# Altium PCB Tray2.PcbDoc (part 2 of 6)
Units mil, origin at the board's own origin, x right, y up, seen from the top; angles counter-clockwise.
Board outline 6000 x 4000 mil, 2 copper layers (Top Layer, Bottom Layer); 418 components, 415 nets, 1799 pads, 870 vias.
Unrouted connection lines stored in the file: 363.
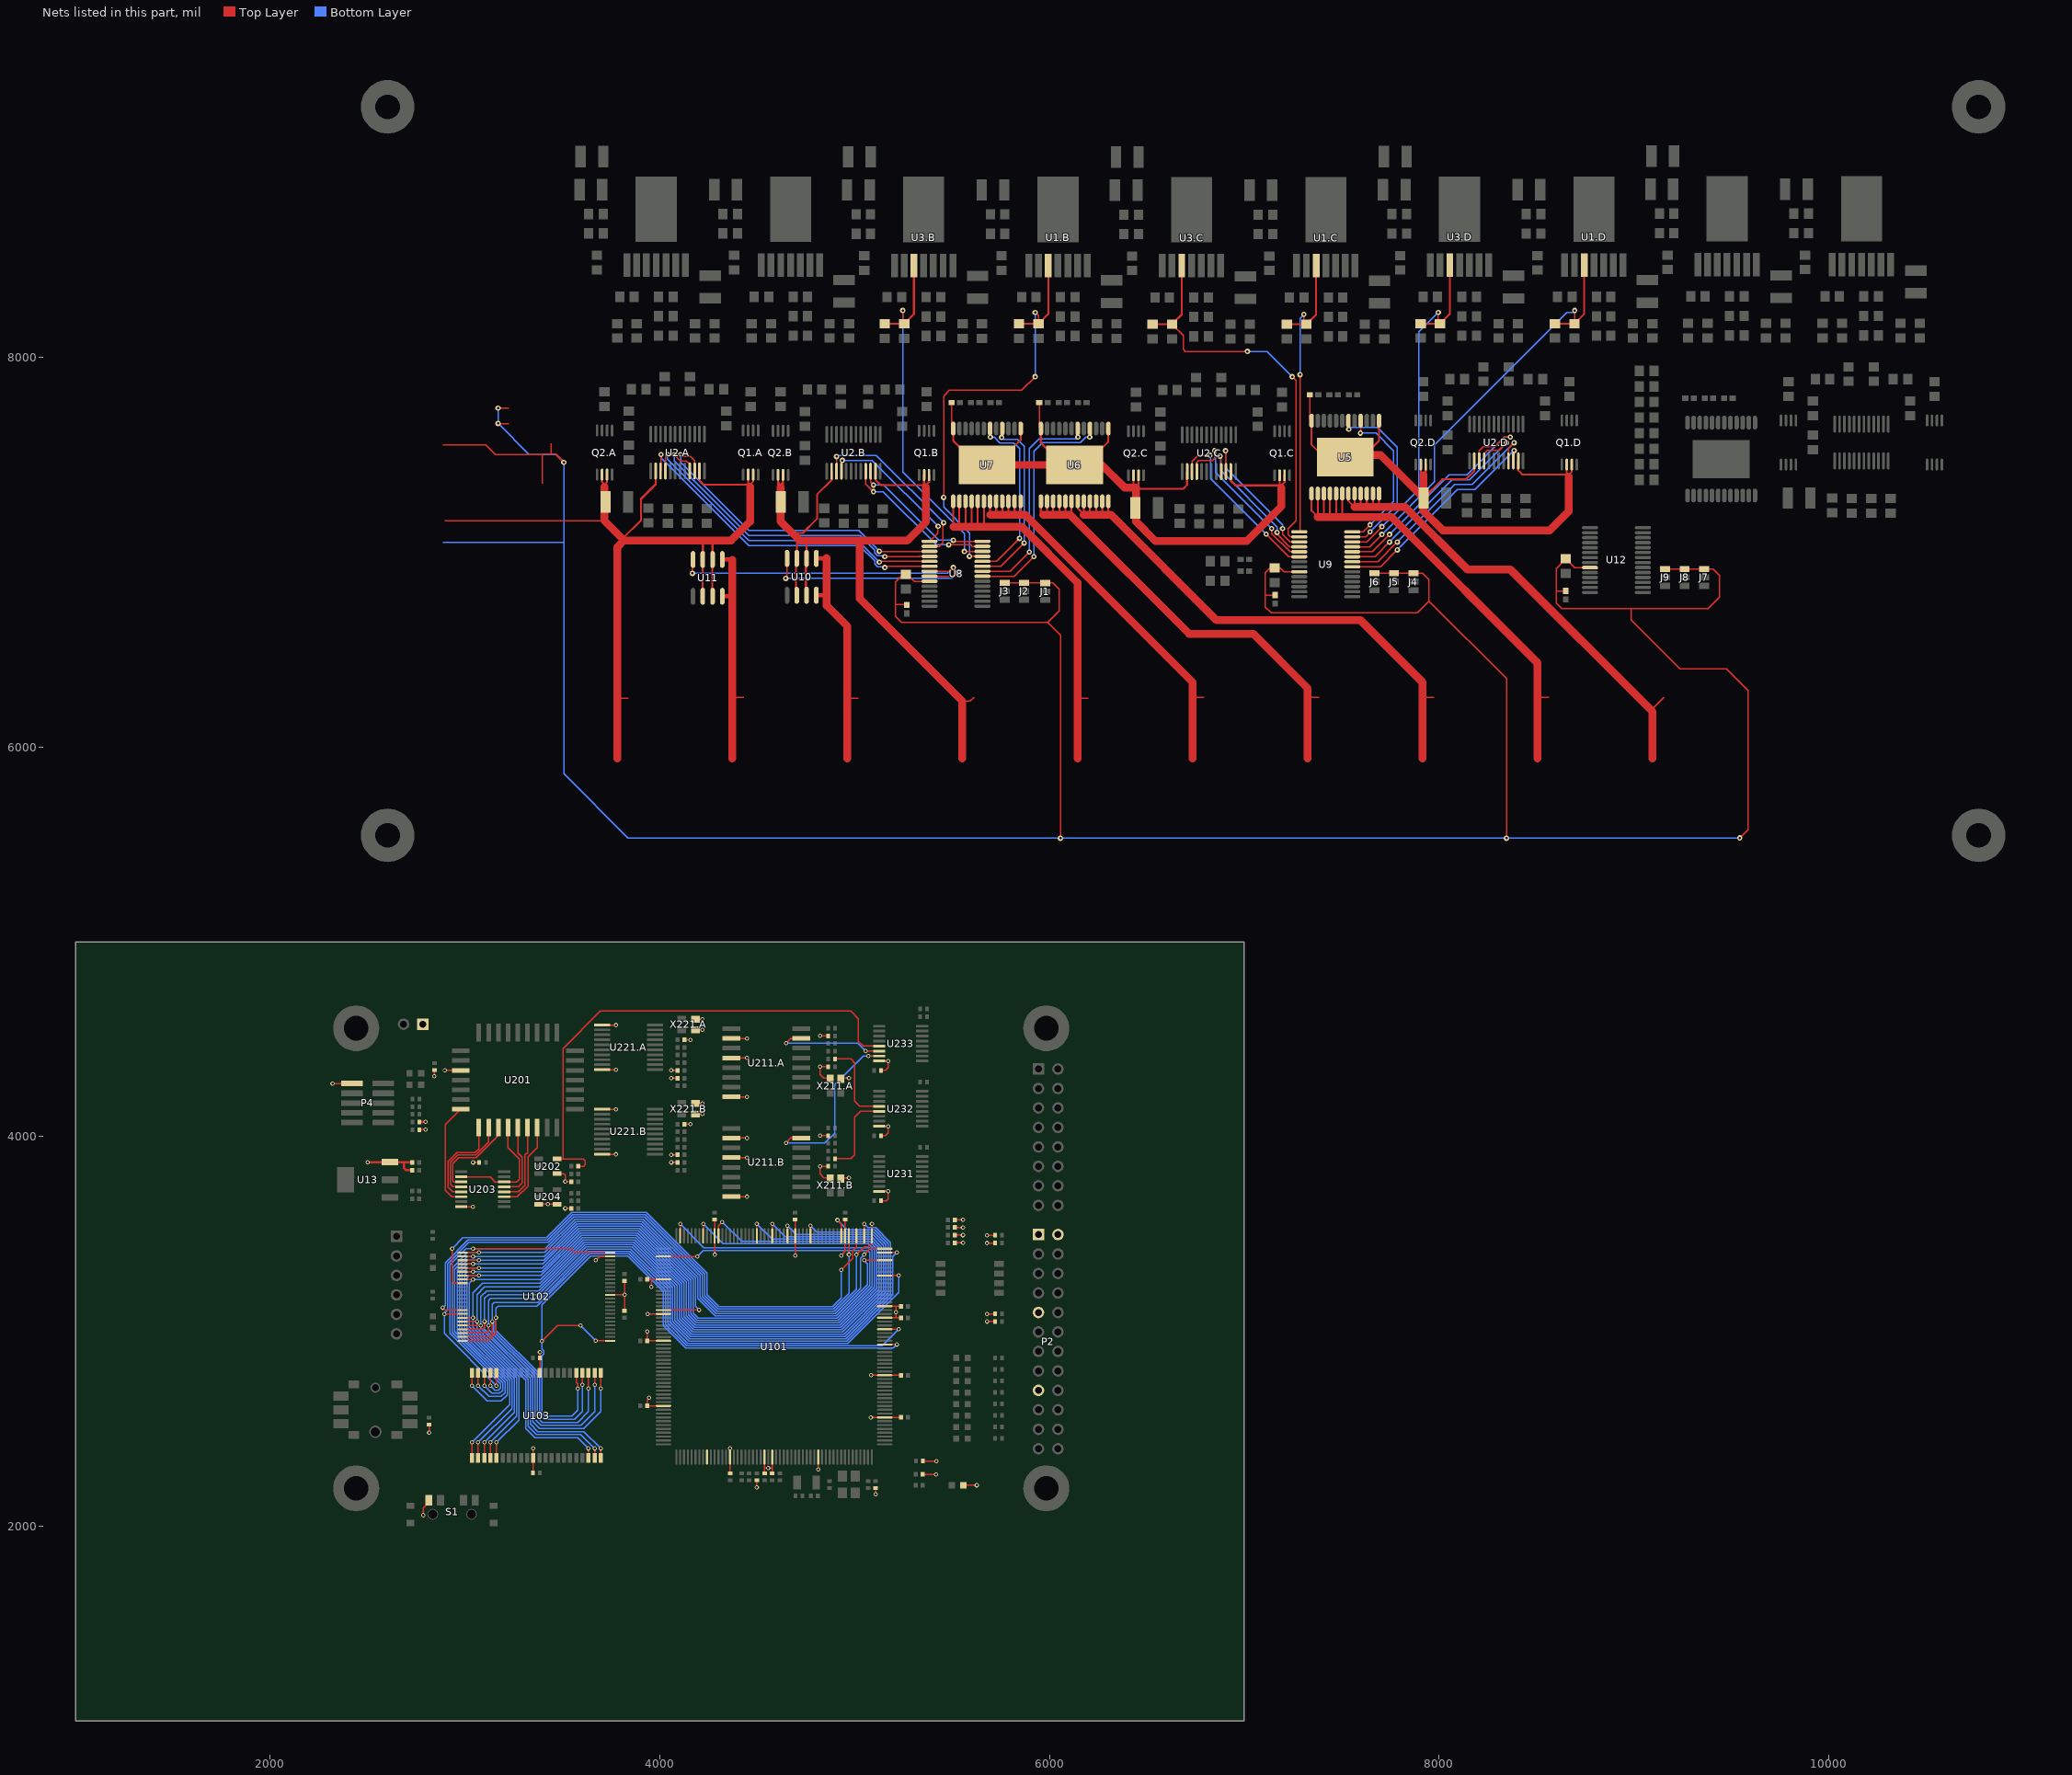
[diagram p2: the nets of this part, all layers, seen from the top]

## Part data
C1.A C1.B C1.C C1.D C1.E C2.A C2.B C2.C C2.D C2.E C3.A C3.B C3.C C3.D C3.E C4.A C4.B C4.C C4.D C4.E C5.A C5.B C5.C C5.D C5.E C6.A C6.B C6.C C6.D C6.E C7.A C7.B C7.C C7.D C7.E C8.A C8.B C8.C C8.D C8.E C9.A C9.B C9.C C9.D C9.E C10.A C10.B C10.C C10.D C10.E C11.A C11.B C11.C C11.D C11.E C12.A C12.B C12.C C12.D C12.E C13.A C13.B C13.C C13.D C13.E C14.A C14.B C14.C C14.D C14.E C15.A C15.B C15.C C15.D C15.E C16.A C16.B C16.C C16.D C16.E C17.A C17.B C17.C C17.D C17.E C18.A C18.B C18.C C18.D C18.E C19.A C19.B C19.C C19.D C19.E C20 C21 C22: library part Cap, "Capacitor"
C23 C24 C25 C26 C101 C102 C103 C104 C105 C106 C107 C108 C109 C110 C111 C112 C113 C114 C115 C116 C117 C118 C119 C120 C121 C122 C123 C201 C202 C203 C204 C205 C206 C211.A C211.B C212.A C212.B C213.A C213.B C214.A C214.B C221.A C221.B C222.A C222.B C223.A C223.B C224.A C224.B C231 C232 C233: "Capacitor"
D1 D2 D3 D4 D5 D6 D7 D8 D9 D10 D11 D12 D13: library part LED, "Typical INFRARED GaAs LED 0603"
D100 D101: "Typical INFRARED GaAs LED"
FB1.A FB1.B FB1.C FB1.D FB1.E FB2.A FB2.B FB2.C FB2.D FB2.E: library part Inductor, "Inductor"
FB101: library part FB_0402, "Ferite Bead : 0402"
P1: "Header, 8-Pin, Dual row"
P2: "Header, 12-Pin, Dual row"
P4: "Mates with FFSD-05-D-12.00-01-N"
P5: "Header, 2-Pin"
Q1.A Q1.B Q1.C Q1.D Q1.E Q2.A Q2.B Q2.C Q2.D Q2.E: "N-Channel MOSFET"
R1 R2 R3 R4 R5 R6 R7 R8 R9 R10 R46 R47 R48 R49 R50 R51 R52 R53 R54 R55 R56 R57 R58 R59 R60 R101 R102 R103 R104 R201 R202 R211.A R211.B R212.A R212.B R221.A R221.B R222.A R222.B R223.A R223.B R231 R232 R233 R234: "Resistor"
R1.A R1.B R1.C R1.D R1.E R2.A R2.B R2.C R2.D R2.E R3.A R3.B R3.C R3.D R3.E R4.A R4.B R4.C R4.D R4.E R5.A R5.B R5.C R5.D R5.E R6.A R6.B R6.C R6.D R6.E R7.A R7.B R7.C R7.D R7.E R8.A R8.B R8.C R8.D R8.E R9.A R9.B R9.C R9.D R9.E R10.A R10.B R10.C R10.D R10.E R11.A R11.B R11.C R11.D R11.E R12.A R12.B R12.C R12.D R12.E R13.A R13.B R13.C R13.D R13.E R14.A R14.B R14.C R14.D R14.E R15.A R15.B R15.C R15.D R15.E R16.A R16.B R16.C R16.D R16.E R17.A R17.B R17.C R17.D R17.E R18.A R18.B R18.C R18.D R18.E R19 R20 R21 R22 R23 R24 R25 R26 R27 R28 R29 R30 R31 R32 R33 R34 R35 R36 R37 R38 R39 R40 R41 R42 R43 R44.A R44.B R44.C R44.D R44.E R45.A R45.B R45.C R45.D R45.E: library part Res3, "Resistor"
S1: "Slide switch SP3T switch"
S2: "DIP Switch - 1571983-5"
S3: "Tact Switch"
U1.A U1.B U1.C U1.D U1.E U3.A U3.B U3.C U3.D U3.E: "1A SIMPLE SWITCHER® Power Module for High Output  Voltage"
U2.A U2.B U2.C U2.D U2.E: "Dual Ideal Diode and  Hot Swap Controller"
U4 U5 U6 U7: "Double channel high-side driver with analog current sense"
U8 U9 U12: "16-Bit I/O Expander with Serial Interface"
U10 U11: "Single Protected High Side Switches"
U101: "ARM7 16/32-Bit Microcontroller, 512KB Flash, 98KB RAM, 208-Lead LQFP"
U102: "16-Mbit (1M x 16) Static RAM"
U103: "FRAM, 2MB, 3V, 60NS, 44TSOP2"
U201: "512 Kbit (32Kb X 8) UV EPROM and OTP EPROM"
U202 U204: library part MIC1557, "Miniature Astable Timer Chip"
U203: "Dual Binary Up-Counter"
U211.A U211.B: "Bell 202 Compatible Modem"
U221.A U221.B: "3 Volt Integrated DTMF Receiver"
U231 U232: "Triple 2-Channnel Analog Multiplexer/Demutiplexer"
U233: "8-Channel Analog Multiplexer/Demultiplexer"
X101: library part "C.O. 4pins", "Crystal Oscillator"
X102: library part "C.O. 2pins", "Crystal Oscillator"
X211.A X211.B X221.A X221.B: "SMD Clock Oscillator, 3.579545MHz"

## Free pads (board coordinates)
  round 236.22 hole 125.98: 0(2441.02,4556.22) 1(5984.33,4556.22) 2(5984.33,2194.02) 3(2441.02,2194.02)
  round 275.59 hole 125.98: 0(2602.28,5546.97) 1(2602.28,9287.13) 2(10771.57,9287.13) 3(10771.57,5546.97)

## Via types
v1: diameter 21.65, hole 11.81, Top Layer to Bottom Layer, tented both sides, 370 vias
v2: diameter 27.56, hole 11.81, Top Layer to Bottom Layer, tented both sides, 231 vias
v3: diameter 27.56, hole 11.81, Top Layer to Bottom Layer, tented bottom, 120 vias
v4: diameter 25.98, hole 12.99, Top Layer to Bottom Layer, tented both sides, 96 vias
v5: diameter 50, hole 28, Top Layer to Bottom Layer, tented both sides, 40 vias
v6: diameter 21.65, hole 13.78, Top Layer to Bottom Layer, 13 vias

## Nets (pads, with @x,y where several pads share a name; then routed paths per layer and width w, separated by ;. In a path a pad name is that pad's centre, name@x,y a point inside that pad or via, vN(x,y) a via of type N, cw(c..) or ccw(c..) an arc to the next point about the centre after c; other vN are vias at no path point)
3V0_PAYLOAD_EN: U8.7 U11.4 | length 1550.4
  Top Layer w6: v2(4167.01,6891.69) U11.4@4167.01,6959.49 ; U8.7@5384.8,6902.44 5487.76,6902.44 v2(5507.01,6921.69)
  Bottom Layer w6: v2(4167.01,6891.69) 5477.01,6891.69 v2(5507.01,6921.69)
3V3: C1.A.2 C23.2 C24.2 C101.2 C102.2 C103.2 C104.2 C105.2 C106.2 C107.2 C108.2 C109.2 C110.2 C111.2 C112.2 C113.2 C116.2 C117.2 C118.2 C119.2 C201.1 C202.1 C203.1 C204.2 C211.A.2 C211.B.2 C212.A.2 C212.B.2 C222.A.2 C222.B.2 C223.A.1 C223.B.1 C224.A.1 C224.B.1 C231.2 C232.2 C233.2 D9.1 FB101.1 P2.1 P2.2 P2.9 P2.17 P4.1 P5.1 Q1.A.S2 Q2.A.S1 R1.2 R2.2 R3.2 R4.2 R5.2 R6.2 R46.1 R47.1 R48.1 R49.1 R50.1 R51.2 R102.2 R103.2 S1.1 U2.A.14 U2.A.23 U11.2 U11.3 U11.6 U11.7 U13.3 U101.9 U101.15 U101.24 U101.26 U101.38 U101.60 U101.71 U101.86 U101.89 U101.112 U101.125 U101.146 U101.165 U101.174 U101.181 U101.198 U102.37 U102.47 U103.11 U103.33 U201.32 U202.4 U203.16 U204.3 U204.4 U211.A.10 U211.A.12 U211.A.16 U211.B.10 U211.B.12 U211.B.16 U221.A.11 U221.A.20 U221.B.11 U221.B.20 U231.16 U232.16 U233.16 X211.A.1 X211.A.4 X211.B.1 X211.B.4 X221.A.1 X221.A.4 X221.B.1 X221.B.4 | length 10687
  Top Layer w5.91: v1(2319.17,4272.17) 2319.37,4272.36 P4.1@2420.08,4272.36 ; R51.2@2765.83,4035.55 v1(2797.32,4035.55) ; v1(2785.51,2056.22) 2785.51,2092.53 S1.1@2814.15,2121.17 ; v1(2815.04,2479.45) R50.1@2815.04,2520.79 ; v1(2842.6,4310.16) C201.1@2842.6,4339.69 ; v6(2895.55,4340.47) U201.32@2977.05,4340.47 ; U203.16@2980.39,3639.88 v1(3039.45,3639.88) ; v1(3041.42,3867.24) C203.1@3072.91,3867.24 ; C117.2@3348.5,2272.76 U103.33@3348.5,2347.56 ; U103.33@3350.47,2349.53 v1(3350.47,2400.71) ; U204.3@3378.03,3652.68 v1(3425.28,3652.68) U204.4@3472.52,3652.68 ; U103.11@3383.94,2788.5 C116.2@3383.94,2863.31 v1(3383.94,2892.83) ; U202.4@3472.52,3810.16 3505.98,3810.16 3513.86,3802.28 v1(3513.86,3768.82) C202.1@3545.35,3768.82 ; v1(3513.86,3631.02) C204.2@3545.35,3631.02 ; v1(3671.34,3365.28) 3691.02,3384.96 U102.47@3745.16,3384.96 ; U221.B.20@3728.43,3909.57 v1(3774.68,3909.57) ; U221.B.11@3728.43,4139.88 v1(3774.68,4139.88) ; U221.A.20@3728.43,4342.64 v1(3774.68,4342.64) ; U221.A.11@3728.43,4572.95 v1(3774.68,4572.95) ; U102.37@3745.16,3188.11 v1(3818.98,3188.11) ; C119.2@3818.98,3105.43 v1(3818.98,3188.11) ; C118.2@3818.98,3258.98 v1(3818.98,3188.11) ; C111.2@3935.12,3266.85 3956.77,3266.85 ; v1@3937.09,3001.1 v1(3935.12,2999.13) C112.2@3935.12,2951.89 U101.181@4018.78,2951.89 ; v1(3937.09,3089.69) U101.174@4018.78,3089.69 ; v1(3944.96,2658.58) 3935.12,2648.74 C113.2@3935.12,2617.24 U101.198@4018.78,2617.24 ; v1(3956.77,3227.48) 3956.77,3266.85 ; U101.165@4018.78,3266.85 3956.77,3266.85 ; v1(4059.13,3867.24) C222.B.2@4090.63,3867.24 ; v1(4059.13,3906.61) C223.B.1@4090.63,3906.61 ; v1(4059.13,4300.32) C222.A.2@4090.63,4300.32 ; v1(4059.13,4339.69) C223.A.1@4090.63,4339.69 ; C224.B.1@4126.06,4064.09 v1(4157.56,4064.09) ; C224.A.1@4126.06,4497.17 v1(4157.56,4497.17) ; X221.B.4@4183.15,4115.28 v1@4216.61,4115.28 ; X221.A.4@4183.15,4548.35 v1(4218.58,4548.35) ; X221.A.1@4183.15,4603.46 v1(4218.58,4603.46) ; X221.B.1@4185.12,4170.39 v1(4218.58,4170.39) ; v1@4281.57,3404.65 U101.146@4281.57,3490.28 C110.2@4281.57,3573.94 ; C101.2@4360.31,2272.76 U101.15@4360.31,2354.45 v1(4360.31,2399.72) v1@4360.31,2404.65 ; U211.B.16@4368.19,3692.24 v1(4447.32,3692.24) ; U211.B.12@4368.19,3892.24 v1(4447.32,3892.24) ; U211.B.10@4368.19,3992.24 v1(4447.32,3992.24) ; U211.A.16@4368.19,4204.06 v1(4447.32,4204.06) ; U211.A.12@4368.19,4404.06 v1(4447.32,4404.06) ; U211.A.10@4368.19,4504.06 v1(4447.32,4504.06) ; v1(4498.11,2198.94) FB101.1@4498.11,2235.35 ; C102.2@4535.51,2272.76 4537.48,2274.72 U101.24@4537.48,2354.45 ; 4537.48,2297.36 v1(4557.17,2297.36) 4576.85,2297.36 ; U101.26@4576.85,2354.45 4576.85,2297.36 ; C103.2@4578.82,2272.76 4576.85,2274.72 4576.85,2297.36 ; v1(4694.96,3389.88) U101.125@4694.96,3490.28 C109.2@4694.96,3573.94 ; v1(4813.07,2291.46) U101.38@4813.07,2362.32 ; v1(4822.91,4005.04) C211.B.2@4864.25,4005.04 ; v1(4822.91,4516.85) C211.A.2@4864.25,4516.85 ; C212.B.2@4864.25,3847.56 v1(4822.91,3847.56) 4822.91,3808.19 4842.6,3788.5 4870.16,3788.5 X211.B.1@4874.09,3784.57 ; C212.A.2@4864.25,4359.37 v1(4822.91,4359.37) 4822.91,4320 4842.6,4300.31 4870.16,4300.31 X211.A.1@4874.09,4296.38 ; X211.B.4@4929.21,3784.57 4933.15,3788.5 v1(4970.55,3788.5) ; X211.A.4@4929.21,4296.38 4933.15,4300.31 v1(4970.55,4300.31) ; v1(4931.18,3389.88) 4950.87,3409.57 U101.112@4950.87,3490.28 C108.2@4950.87,3573.94 ; v1(5083.74,2558.19) U101.60@5154.61,2558.19 C104.2@5238.27,2558.19 ; v1(5084.72,2774.72) U101.71@5154.61,2774.72 C105.2@5238.27,2774.72 ; v1(5108.35,2164.49) R102.2@5108.35,2195.98 ; U231.16@5126.06,3718.62 v1(5172.32,3718.62) 5172.32,3680.24 5162.48,3670.39 C231.2@5135.91,3670.39 ; U232.16@5126.06,4053.27 v1(5172.32,4053.27) 5172.32,4019.8 5157.56,4005.04 C232.2@5135.91,4005.04 ; U233.16@5126.06,4387.91 v1(5172.32,4387.91) 5172.32,4354.45 5157.56,4339.69 C233.2@5135.91,4339.69 ; U101.86@5154.61,3070 5211.69,3070 ; U101.89@5154.61,3129.06 5211.69,3129.06 ; C106.2@5238.27,3070 5211.69,3070 ; C107.2@5238.27,3129.06 5211.69,3129.06 ; R5.2@5349.49,2265.87 v1(5418.39,2265.87) ; R6.2@5350.47,2333.78 v1(5419.37,2333.78) ; R4.2@5514.84,3454.84 v1(5556.18,3454.84) ; R3.2@5514.84,3494.21 v1(5556.18,3494.21) ; R2.2@5514.84,3533.58 v1(5556.18,3533.58) ; R1.2@5514.84,3572.95 v1(5556.18,3572.95) ; D9.1@5558.15,2209.76 v1(5627.05,2209.76) ; v1(5679.21,3050.32) R48.1@5720.55,3050.32 ; v1(5679.21,3089.69) R49.1@5720.55,3089.69 ; v1(5679.21,3453.86) R46.1@5720.55,3453.86 ; v1(5679.21,3493.23) R47.1@5720.55,3493.23 ; 5211.69,3070 v1(5211.69,3099.53) 5211.69,3129.06
  Top Layer w6: 2896.42,7161.1 3716.18,7161.1 ; 3781.81,6251.69 3837.48,6251.69
  Top Layer w10: Q2.A.S1@3703.39,7398.94 3703.39,7361.14 3716.18,7348.35 ; 3716.18,7329.06 3716.18,7348.35 ; Q2.A.S1@3728.98,7398.94 3728.98,7361.14 3716.18,7348.35 ; 3808.3,7068.98 3903.01,7163.69 3903.01,7273.95 3978.68,7349.63 U2.A.14@3978.68,7417.64 ; U2.A.23@4203.68,7417.64 4203.68,7369.63 4226.18,7347.13 4456.18,7347.13 ; U11.6@4219.69,6745.71 U11.3@4219.69,6934.69 ; U11.3@4220.71,6963.19 4220.71,7060.08 ; U11.7@4269.69,6745.71 U11.2@4269.69,6934.69 ; U11.2@4270.71,6963.19 4270.71,7060.08 ; Q1.A.S2@4453.39,7398.94 4453.39,7349.92 4456.18,7347.13 ; Q1.A.S2@4478.98,7398.94 4478.98,7363.07 4463.03,7347.13 4456.18,7347.13
  Top Layer w11.81: v1(2499.09,3869.21) U13.3@2614.25,3869.21 2687.09,3869.21 ; C24.2@2728.43,3827.87 2696.93,3827.87 2687.09,3837.72 2687.09,3869.21 ; C23.2@2728.43,3867.24 2726.46,3869.21 2687.09,3869.21 ; R103.2@2765.91,4075.5 v1(2797.4,4075.5)
  Top Layer w40: 3716.18,7336.1 3716.18,7161.1 3816.18,7061.1 ; 3781.81,5940.67 3781.81,6251.69 3781.81,7026.73 3816.18,7061.1 ; 3808.3,7068.98 3816.18,7061.1 ; 4463.03,7336.1 4463.03,7157.95 4366.18,7061.1 3816.18,7061.1
  other v1: 4281.57,3394.8 4218.58,4115.28
3V3_FAULT1: U2.A.21 U8.4 | length 1691.7
  Top Layer w6: v2(4073.45,7501.69) 4105.2,7469.94 4135.26,7469.94 4153.68,7451.53 U2.A.21@4153.68,7417.64 ; v2(5154.98,6977.61) 5333.2,6977.61 5334.8,6979.21 U8.4@5384.8,6979.21
  Bottom Layer w6: v2(4073.45,7501.69) 4073.45,7469.66 4457.01,7086.1 5029.52,7086.1 5104.23,7011.39 5104.23,6996.15 5117.57,6982.8 5149.79,6982.8 v2(5154.98,6977.61)
3V3_FAULT2: U2.A.16 U8.5 | length 1678
  Top Layer w6: U2.A.16@4028.68,7417.64 4028.68,7490.48 v2(4039.89,7501.69) ; v2(5127.01,6949.64) 5130.99,6953.62 U8.5@5384.8,6953.62
  Bottom Layer w6: v2(4039.89,7501.69) 4039.89,7477.63 4457.01,7060.51 5016.13,7060.51 v2(5127.01,6949.64)
3V3_PAYLOAD: U11.1 U11.8 | length 1182.4
  Top Layer w6: 4372.36,6261.69 4378.43,6255.63 4431.97,6255.63
  Top Layer w20: U11.8@4320.71,6774.21 4369.84,6774.21 ; U11.1@4320.71,6963.19 4370.87,6963.19
  Top Layer w40: 4372.36,5940.67 4372.36,6261.69 4372.36,6961.69
3V3_PWR: C20.1 C21.1 C22.1 J1.1 J2.1 J3.1 J4.1 J5.1 J6.1 J7.1 J8.1 J9.1 R31.1 R32.1 R43.1 U8.9 U9.9 U12.9 | length 19112
  Top Layer w6: 2887.01,7551.69 3107.01,7551.69 3155.78,7502.92 3397.35,7502.92 3397.35,7433.69 3397.35,7353.69 ; v2(3169.21,7661.54) 3170.79,7659.96 3224.33,7659.96 ; v2(3169.21,7739.96) 3224.33,7739.96 ; 3397.01,7503.27 3440.87,7503.27 ; 3440.87,7558.39 3440.87,7503.27 ; v2(3507.01,7461.69) 3465.43,7503.27 3440.87,7503.27 ; R31.1@5260.63,6731.3 5212.28,6731.3 5210.63,6729.65 ; U8.9@5384.8,6851.26 5306.42,6851.26 5260.63,6897.05 5210.63,6847.05 5210.63,6729.65 ; J3.1@5770.63,6843.3 6016.98,6843.3 6050.63,6809.65 6050.63,6699.65 5990.63,6639.65 ; v2(6057.01,5531.69) 6057.01,6573.27 5990.63,6639.65 ; R32.1@7159.45,6780.35 7111.1,6780.35 7109.45,6778.7 ; U9.9@7283.62,6900.31 7205.24,6900.31 7186.46,6919.09 C21.1@7157.01,6919.09 7132.44,6919.09 7109.45,6896.1 7109.45,6778.7 ; J6.1@7669.45,6892.35 J5.1@7769.45,6892.35 J4.1@7869.45,6892.35 7915.8,6892.35 7949.45,6858.7 7949.45,6748.7 ; v2(8347.01,5531.69) 8347.01,6351.14 7949.45,6748.7 ; R43.1@8651.82,6801.77 8603.47,6801.77 8601.82,6800.12 ; U12.9@8775.99,6921.73 8697.61,6921.73 C22.1@8651.82,6967.52 8601.82,6917.52 8601.82,6800.12 ; J9.1@9161.82,6913.77 9408.17,6913.77 9441.82,6880.12 9441.82,6770.12 9381.82,6710.12 8987.01,6710.12 ; v2(9545.07,5533.63) 9587.01,5575.57 9587.01,6291.69 9477.01,6401.69 9237.01,6401.69 8987.01,6651.69 8987.01,6710.12 ; 5210.63,6729.65 5210.63,6669.65 5240.63,6639.65 5990.63,6639.65 ; 7109.45,6778.7 7109.45,6718.7 7139.45,6688.7 7889.45,6688.7 7949.45,6748.7 ; 8601.82,6800.12 8601.82,6740.12 8631.82,6710.12 8987.01,6710.12
  Bottom Layer w6: 2887.01,7051.69 3507.01,7051.69 ; v2(3169.21,7739.96) v2(3169.21,7661.54) 3329.06,7501.69 3467.01,7501.69 v2(3507.01,7461.69) 3507.01,7051.69 ; v2(9545.07,5533.63) 3837.01,5533.63 3507.01,5863.63 3507.01,7051.69
3V3_PWRGD1: U2.A.22 U8.3 | length 1644.2
  Top Layer w6: v2(4107.01,7501.69) 4117.01,7491.69 4157.01,7491.69 4178.68,7470.02 U2.A.22@4178.68,7417.64 ; v2(5127.01,7005.58) 5127.79,7004.8 U8.3@5384.8,7004.8
  Bottom Layer w6: v2(4107.01,7501.69) 4107.01,7461.69 4457.01,7111.69 5020.9,7111.69 v2(5127.01,7005.58)
3V3_PWRGD2: U2.A.15 U8.6 | length 1724.9
  Top Layer w6: U2.A.15@4003.68,7417.64 4006.33,7420.29 v2(4006.33,7501.69) ; v2(5154.98,6921.66) 5161.35,6928.03 U8.6@5384.8,6928.03
  Bottom Layer w6: v2(4006.33,7501.69) 4006.33,7485.6 4457.01,7034.92 5024.75,7034.92 5104.23,6955.45 5104.23,6940.2 5117.57,6926.86 5149.79,6926.86 v2(5154.98,6921.66)
5V0: C1.B.2 Q1.B.S2 Q2.B.S1 U2.B.14 U2.B.23 U10.2 U10.3 U10.6 U10.7 | length 4153.1
  Top Layer w6: 5553.46,6235.24 5592.68,6235.24 5613.07,6255.63
  Top Layer w10: 4606.73,7348.43 4606.73,7359.65 ; Q2.B.S1@4606.73,7397.44 4606.73,7359.65 ; 4632.32,7348.43 4632.32,7359.65 ; Q2.B.S1@4632.32,7397.44 4632.32,7359.65 ; 4680.06,7099.08 4734.39,7099.08 4806.95,7171.64 4806.95,7295.97 4882.03,7371.04 U2.B.14@4882.03,7416.14 ; U10.6@4699.69,6764.21 U10.3@4699.69,6953.19 ; U10.3@4703.19,6968.35 4703.19,7062.2 4709.69,7068.7 ; U10.7@4749.69,6764.21 U10.2@4749.69,6953.19 ; 4749.69,7059.61 4753.19,7056.1 U10.2@4753.19,6968.35 ; U2.B.23@5107.03,7416.14 5107.03,7371.67 5133.07,7345.63 5359.53,7345.63 ; Q1.B.S2@5356.73,7397.44 5356.73,7348.43 5359.53,7345.63 ; Q1.B.S2@5382.32,7397.44 5382.32,7361.57 5366.38,7345.63 5359.53,7345.63 ; 4606.73,7359.65 4619.53,7346.85 4632.32,7359.65
  Top Layer w40: 4619.53,7334.61 4619.53,7327.56 4619.53,7159.61 4680.06,7099.08 4719.53,7059.61 4749.69,7059.61 5027.01,7059.61 ; 5366.38,7334.61 5366.38,7156.46 5269.53,7059.61 5027.01,7059.61 ; 5553.46,5940.67 5553.46,6235.24 5027.01,6761.69 5027.01,7059.61
5V0_EN1: R6.B.2 R9.B.1 U1.B.3 U8.25 | length 2272.4
  Top Layer w6: v2(5457.01,7281.69) 5457.01,7801.69 5487.01,7831.69 5857.01,7831.69 v2(5927.01,7901.69) ; v2(5589.49,6979.21) U8.25@5656.46,6979.21 ; v2(5927.01,8231.69) 5944.53,8214.17 R9.B.1@5944.53,8173.03
  Top Layer w10: R6.B.2@5844.53,8173.03 R9.B.1@5944.53,8173.03 5994.53,8223.03 U1.B.3@5994.53,8473.03
  Bottom Layer w6: v2(5457.01,7281.69) 5457.01,7231.69 5589.49,7099.21 v2(5589.49,6979.21) ; v2(5927.01,7901.69) v2(5927.01,8231.69)
5V0_EN2: R15.B.2 R18.B.1 U3.B.3 U8.26 | length 1953.2
  Top Layer w6: v2(5247.01,8241.69) 5247.01,8180.55 R18.B.1@5254.53,8173.03 ; v2(5563.9,7004.8) U8.26@5656.46,7004.8
  Top Layer w10: R15.B.2@5154.53,8173.03 R18.B.1@5254.53,8173.03 5267.03,8185.53 5304.53,8223.03 U3.B.3@5304.53,8473.03
  Bottom Layer w6: v2(5247.01,8241.69) 5247.01,7411.69 5563.9,7094.8 v2(5563.9,7004.8)
5V0_FAULT1: U2.B.21 U8.27 | length 797
  Top Layer w6: U2.B.21@5057.03,7416.14 5057.03,7351.67 v2(5097.01,7311.69) ; v2(5483.28,7037.96) 5597.23,7037.96 5604.8,7030.39 U8.27@5656.46,7030.39
  Bottom Layer w6: v2(5097.01,7311.69) 5147.01,7311.69 5420.74,7037.96 v2(5483.28,7037.96)
5V0_FAULT2: U2.B.16 U8.1 | length 778.2
  Top Layer w6: U2.B.16@4932.03,7416.14 v2@4932.03,7466.71 ; U8.1@5384.8,7055.98 5427.01,7098.19 5427.01,7131.69 v2(5428.81,7133.5)
  Bottom Layer w6: v2(4937.01,7471.69) 5090.61,7471.69 v2(5428.81,7133.5)
5V0_PAYLOAD: U10.1 U10.8 | length 1232.5
  Top Layer w6: 4962.91,6251.69 5018.58,6251.69
  Top Layer w20: U10.8@4803.19,6779.37 4854.68,6779.37 ; U10.1@4803.19,6968.35 4853.66,6968.35
  Top Layer w40: 4857.01,6971.69 4857.01,6725.55 4962.91,6619.65 4962.91,6251.69 4962.91,5940.67
5V0_PAYLOAD_EN: U8.8 U10.4 | length 1147.7
  Top Layer w6: v2@4653.19,6872.28 U10.4@4653.19,6968.35 ; U8.8@5384.8,6876.85 5509.62,6876.85 v2(5530.74,6897.96)
  Bottom Layer w6: v2(4647.01,6866.1) 5498.88,6866.1 v2(5530.74,6897.96)
5V0_PWRGD1: U2.B.22 U8.28 | length 756.4
  Top Layer w6: U2.B.22@5082.03,7416.14 5082.03,7360.23 v2(5097.01,7345.25) ; v2(5507.01,7061.69) 5512.72,7055.98 U8.28@5656.46,7055.98
  Bottom Layer w6: v2(5097.01,7345.25) 5149.64,7345.25 5433.2,7061.69 v2(5507.01,7061.69)
5V0_PWRGD2: U2.B.15 U8.2 | length 951.5
  Top Layer w6: U2.B.15@4907.03,7416.14 v2(4907.03,7491.67) ; U8.2@5384.8,7030.39 5434.8,7030.39 5452.6,7048.19 5452.6,7147.28 v2(5457.01,7151.69)
  Bottom Layer w6: v2(4907.03,7491.67) 4912.64,7497.28 5111.42,7497.28 v2(5457.01,7151.69)
9V1: C1.C.2 Q1.C.S2 Q2.C.S1 R25.1 R26.1 U2.C.14 U2.C.23 U6.VCC U7.VCC | length 4083.4
  Top Layer w6: R26.1@5498.03,7768.7 5498.03,7644.13 U7.VCC@5506.46,7635.71 ; R25.1@5948.03,7768.7 5948.03,7644.13 U6.VCC@5956.46,7635.71
  Top Layer w10: U7.VCC@5506.46,7635.71 5506.46,7572.24 5630,7448.7 U7.VCC@5679.69,7448.7 5724.02,7448.7 5852.91,7577.6 U7.VCC@5852.91,7635.71 ; U6.VCC@5956.46,7635.71 5956.46,7562.24 6070,7448.7 U6.VCC@6129.69,7448.7 6184.02,7448.7 6302.91,7567.6 U6.VCC@6302.91,7635.71 ; 6431.97,7346.5 Q2.C.S1@6431.97,7395.51 ; 6444.77,7325.63 6686.69,7325.63 6707.27,7346.2 U2.C.14@6707.27,7414.21 ; 6457.56,7346.5 Q2.C.S1@6457.56,7395.51 ; U2.C.23@6932.27,7414.21 6932.27,7366.2 6954.77,7343.7 7184.77,7343.7 ; Q1.C.S2@7181.97,7395.51 7181.97,7346.5 7184.77,7343.7 ; Q1.C.S2@7207.56,7395.51 7207.56,7359.65 7191.62,7343.7 7184.77,7343.7
  Top Layer w40: U7.VCC@5724.02,7448.7 U6.VCC@6070,7448.7 ; U6.VCC@6184.02,7448.7 6269.69,7448.7 6385.71,7332.68 6444.77,7332.68 6444.77,7325.63 6444.77,7157.68 6544.77,7057.68 7012.99,7057.68 7191.62,7236.3 7191.62,7332.68
9V1_EN1: R6.C.2 R9.C.1 U1.C.3 U9.1 | length 1602.9
  Top Layer w6: U9.1@7283.62,7105.04 7287.01,7108.43 v2(7287.01,7911.69) ; v2(7307.01,8221.69) 7307.01,8183.86 R9.C.1@7319.76,8171.1
  Top Layer w10: R6.C.2@7219.76,8171.1 R9.C.1@7319.76,8171.1 7369.77,8221.1 U1.C.3@7369.76,8471.1
  Bottom Layer w6: v2(7287.01,7911.69) 7287.01,8201.69 v2(7307.01,8221.69)
9V1_EN2: R15.C.2 R18.C.1 U3.C.3 U9.2 | length 2088.4
  Top Layer w6: R18.C.1@6629.76,8171.1 6687.01,8113.86 6687.01,8041.69 6697.01,8031.69 v2(7017.01,8031.69) ; v2(7247.01,7901.69) 7267.01,7881.69 7267.01,7161.69 7227.01,7121.69 7227.01,7091.69 7239.25,7079.45 U9.2@7283.62,7079.45
  Top Layer w10: R15.C.2@6529.76,8171.1 R18.C.1@6629.76,8171.1 6642.26,8183.6 6679.76,8221.1 U3.C.3@6679.76,8471.1
  Bottom Layer w6: v2(7017.01,8031.69) 7117.01,8031.69 v2(7247.01,7901.69)
9V1_FAULT1: U2.C.21 U9.4 | length 742.4
  Top Layer w6: v2(6876.59,7493.72) 6882.27,7488.04 U2.C.21@6882.27,7414.21 ; v2@7169.04,7093.72 7234.49,7028.27 U9.4@7283.62,7028.27
  Bottom Layer w6: v2@6878.19,7492.12 6878.19,7420.51 7169.04,7129.67 v2@7169.04,7093.72
  other v2: 7169.04,7101.69
9V1_FAULT2: U2.C.16 U9.5 | length 914.1
  Top Layer w6: U2.C.16@6757.27,7414.21 6757.27,7461.95 6767.01,7471.69 6837.01,7471.69 6848.61,7483.3 v2(6848.61,7521.69) ; v2(7141.06,7121.69) 7141.06,7096.42 7234.8,7002.68 U9.5@7283.62,7002.68
  Bottom Layer w6: v2(6848.61,7521.69) 6852.6,7517.71 6852.6,7410.16 v2(7141.06,7121.69)
9V1_PWRGD1: U2.C.22 U9.3 | length 762
  Top Layer w6: v2(6904.56,7521.69) 6904.56,7416.92 U2.C.22@6907.27,7414.21 ; v2(7197.01,7121.69) 7197.01,7091.65 7234.8,7053.86 U9.3@7283.62,7053.86
  Bottom Layer w6: v2(6904.56,7521.69) 6904.56,7434.14 7197.01,7141.69 v2(7197.01,7121.69)
9V1_PWRGD2: U2.C.15 U9.6 | length 906.5
  Top Layer w6: U2.C.15@6732.27,7414.21 6732.27,7466.95 6763.28,7497.96 v2(6824.88,7497.96) ; v2(7113.09,7093.72) 7229.72,6977.09 U9.6@7283.62,6977.09
  Bottom Layer w6: v2(6824.88,7497.96) v2@6827.01,7500.09 ; v2@6827.01,7501.69 v2@6827.01,7500.09 ; v2(7113.09,7093.72) 6827.01,7379.8 v2@6827.01,7500.09
9V1_RX1: U7.OUT1 | length 2463.8
  Top Layer w6: 6144.02,6251.69 6199.69,6251.69
  Top Layer w10: 5506.46,7132.24 U7.OUT1@5506.46,7261.69 ; 5537.95,7140.75 U7.OUT1@5537.95,7261.69 ; 5569.45,7139.25 U7.OUT1@5569.45,7261.69 ; 5600.94,7137.76 U7.OUT1@5600.94,7261.69 ; 5632.44,7137.13 U7.OUT1@5632.44,7261.69 ; 5663.94,7134.76 U7.OUT1@5663.94,7261.69
  Top Layer w40: 5507.01,7131.69 5857.01,7131.69 6144.02,6844.69 6144.02,6251.69 6144.02,5940.67
9V1_RX1_EN: U7.IN1 U8.24 | length 874.3
  Top Layer w6: U8.24@5656.46,6953.62 5728.94,6953.62 v2(5847.01,7071.69)
  Bottom Layer w6: v2(5697.01,7591.69) 5717.01,7591.69 5747.01,7561.69 5817.01,7561.69 5847.01,7531.69 v2(5847.01,7071.69)
9V1_RX2: U7.OUT2 | length 2252.2
  Top Layer w6: 6734.57,6262.01 6740.94,6255.63 6794.17,6255.63
  Top Layer w10: 5695.43,7193.27 U7.OUT2@5695.43,7261.69 ; 5726.93,7191.77 U7.OUT2@5726.93,7261.69 ; 5758.43,7193.11 U7.OUT2@5758.43,7261.69 ; 5789.92,7194.61 U7.OUT2@5789.92,7261.69 ; 5821.42,7196.1 U7.OUT2@5821.42,7261.69 ; 5852.91,7197.6 U7.OUT2@5852.91,7261.69
  Top Layer w40: 5697.01,7191.69 5877.01,7191.69 6734.57,6334.13 6734.57,6262.01 6734.57,5940.67
9V1_RX2_EN: U7.IN2 U8.23 | length 894.7
  Top Layer w6: U8.23@5656.46,6928.03 5750.81,6928.03 v2(5870.74,7047.96)
  Bottom Layer w6: v2(5755.1,7589.79) 5765.1,7579.79 5835.1,7579.79 5870.74,7544.15 v2(5870.74,7047.96)
9V1_TX1: U6.OUT1 | length 2530.5
  Top Layer w6: 7325.12,6259.57 7329.06,6255.63 7384.72,6255.63
  Top Layer w10: 5956.46,7202.24 U6.OUT1@5956.46,7261.69 ; 5987.95,7200.75 U6.OUT1@5987.95,7261.69 ; 6019.45,7194.13 U6.OUT1@6019.45,7261.69 ; 6050.94,7197.76 U6.OUT1@6050.94,7261.69 ; 6082.44,7196.26 U6.OUT1@6082.44,7261.69 ; 6113.94,7198.62 U6.OUT1@6113.94,7261.69
  Top Layer w40: 5967.01,7191.69 6107.01,7191.69 6717.01,6581.69 7047.01,6581.69 7325.12,6303.58 7325.12,6259.57 7325.12,5940.67
9V1_TX1_EN: U6.IN1 U8.22 | length 1087.6
  Top Layer w6: U8.22@5656.46,6902.44 5797.76,6902.44 v2(5897.01,7001.69)
  Bottom Layer w6: v2(5897.01,7001.69) 5897.01,7531.69 5947.01,7581.69 6140.82,7581.69 v2@6148.91,7589.79
  other v2: 6147.01,7591.69
9V1_TX2: U6.OUT2 | length 2950.3
  Top Layer w6: 7915.67,6263.03 7923.07,6255.63 7975.28,6255.63
  Top Layer w10: U6.OUT2@6145.43,7261.69 6145.43,7226.89 6176.93,7195.39 U6.OUT2@6176.93,7261.69 ; 6208.43,7194.68 U6.OUT2@6208.43,7261.69 ; 6239.92,7196.18 U6.OUT2@6239.92,7261.69 ; 6271.42,7197.68 U6.OUT2@6271.42,7261.69 ; 6302.91,7205.79 U6.OUT2@6302.91,7261.69
  Top Layer w40: 6174.8,7193.27 6315.43,7193.27 6857.01,6651.69 7597.01,6651.69 7915.67,6333.03 7915.67,6263.03 7915.67,5940.67
9V1_TX2_EN: U6.IN2 U8.21 | length 1163.7
  Top Layer w6: U8.21@5656.46,6876.85 5819.62,6876.85 v2(5920.74,6977.96)
  Bottom Layer w6: v2(5920.74,6977.96) 5920.74,7519.23 5965.1,7563.6 6158.91,7563.6 6187.01,7591.69 v2(6207.01,7591.69)
13V6: C1.D.2 Q1.D.S2 Q2.D.S1 R20.1 U2.D.14 U2.D.23 U5.VCC | length 3249.7
  Top Layer w6: R20.1@7338.03,7808.7 7338.03,7684.13 U5.VCC@7346.46,7675.71
  Top Layer w10: U5.VCC@7346.46,7675.71 7346.46,7551.93 7409.69,7488.7 U5.VCC@7519.69,7488.7 7609.69,7488.7 7619.69,7498.7 7692.91,7571.93 U5.VCC@7692.91,7675.71 ; 7906.89,7401.5 Q2.D.S1@7906.89,7450.51 ; C1.D.2@7921.61,7278.7 8017.61,7374.69 8139.01,7374.69 8182.18,7417.87 U2.D.14@8182.18,7469.21 ; 7932.48,7401.5 Q2.D.S1@7932.48,7450.51 ; U2.D.23@8407.18,7469.21 8407.19,7421.2 8429.69,7398.7 8659.69,7398.7 ; Q1.D.S2@8656.89,7450.51 8656.89,7401.5 8659.69,7398.7 ; Q1.D.S2@8682.48,7450.51 8682.48,7414.65 8666.54,7398.7 8659.69,7398.7
  Top Layer w40: U5.VCC@7619.69,7498.7 7701.61,7498.7 C1.D.2@7921.61,7278.7 ; 7921.61,7396.77 C1.D.2@7921.61,7278.7 ; 8666.54,7387.68 8666.54,7209.53 8569.69,7112.68 8019.69,7112.68 7921.67,7210.69 7921.67,7278.64 C1.D.2@7921.61,7278.7
13V6_EN1: R6.D.2 R9.D.1 U1.D.3 U9.25 | length 2250.1
  Top Layer w6: U9.25@7555.28,7028.27 7643.58,7028.27 v2(7707.01,7091.69) ; R9.D.1@8696.14,8174.17 8697.01,8175.04 v2(8697.01,8241.69)
  Top Layer w10: R6.D.2@8596.14,8174.17 R9.D.1@8696.14,8174.17 8746.14,8224.17 U1.D.3@8746.14,8474.17
  Bottom Layer w6: v2(7707.01,7091.69) 7977.01,7361.69 7977.01,7551.69 8657.01,8231.69 8697.01,8231.69 v2(8697.01,8241.69)
13V6_EN2: R15.D.2 R18.D.1 U3.D.3 U9.26 | length 1886.1
  Top Layer w6: U9.26@7555.28,7053.86 7629.17,7053.86 v2(7707.01,7131.69) ; v2(7997.01,8231.69) 7997.01,8183.31 R18.D.1@8006.14,8174.17
  Top Layer w10: R15.D.2@7906.14,8174.17 R18.D.1@8006.14,8174.17 8018.64,8186.67 8056.14,8224.17 U3.D.3@8056.14,8474.17
  Bottom Layer w6: v2(7707.01,7131.69) 7897.01,7321.69 7897.01,8131.69 v2(7997.01,8231.69)
13V6_FAULT1: U2.D.21 U9.22 | length 1189.3
  Top Layer w6: U9.22@7555.28,6951.5 7685.93,6951.5 v2(7786.57,7052.13) ; U2.D.21@8357.18,7469.21 8357.18,7532.75 v2(8386.57,7562.13)
  Bottom Layer w6: v2(7786.57,7052.13) 8081.72,7347.28 8171.72,7347.28 v2(8386.57,7562.13)
13V6_FAULT2: U2.D.16 U9.23 | length 1209.4
  Top Layer w6: U9.23@7555.28,6977.09 7671.96,6977.09 v2(7747.01,7052.13) ; U2.D.16@8232.18,7469.21 8232.18,7506.87 8248.58,7523.27 8308.14,7523.27 v2(8347.01,7562.13)
  Bottom Layer w6: v2(7747.01,7052.13) 8067.75,7372.87 8157.75,7372.87 v2(8347.01,7562.13)
13V6_PWRGD1: U2.D.22 U9.21 | length 1137.2
  Top Layer w6: U9.21@7555.28,6925.91 7699.9,6925.91 v2(7786.57,7012.57) ; U2.D.22@8382.18,7469.21 8382.18,7523.27 8385.87,7523.27 v2(8386.57,7522.57)
  Bottom Layer w6: v2(7786.57,7012.57) 8095.69,7321.69 8185.69,7321.69 v2(8386.57,7522.57)
13V6_PWRGD2: U2.D.15 U9.24 | length 1297.1
  Top Layer w6: U9.24@7555.28,7002.68 7657.99,7002.68 v2(7747.01,7091.69) ; U2.D.15@8207.18,7469.21 8207.18,7521.87 8227.01,7541.69 8287.01,7541.69 8337.01,7591.69 v2(8367.01,7591.69)
  Bottom Layer w6: v2(7747.01,7091.69) 8053.78,7398.46 8143.78,7398.46 8337.01,7591.69 v2(8367.01,7591.69)
13V6_TX1: U5.OUT1 | length 2719.1
  Top Layer w6: 8510.16,6255.63 8565.83,6255.63
  Top Layer w10: U5.OUT1@7346.46,7301.69 7346.46,7213.19 7377.95,7181.69 U5.OUT1@7377.95,7301.69 ; 7409.45,7181.69 U5.OUT1@7409.45,7301.69 ; 7440.94,7181.69 U5.OUT1@7440.94,7301.69 ; 7472.44,7181.69 U5.OUT1@7472.44,7301.69 ; 7503.94,7181.69 U5.OUT1@7503.94,7301.69
  Top Layer w40: 7377.95,7181.69 7409.45,7181.69 7440.94,7181.69 7472.44,7181.69 7503.94,7181.69 7757.01,7181.69 8506.22,6432.48 8506.22,5940.67
13V6_TX1_EN: U5.IN1 U9.27 | length 895.7
  Top Layer w6: U9.27@7555.28,7079.45 7624.32,7079.45 v2@7647.01,7102.13
  Bottom Layer w6: v2(7537.01,7631.69) 7537.01,7641.25 7683.64,7641.25 7785.1,7539.79 7785.1,7243.6 v2(7647.01,7105.5) v2@7647.01,7102.13
13V6_TX2: U5.OUT2 | length 2737.4
  Top Layer w6: 9096.77,6181.93 9096.77,6196.02 9156.38,6255.63
  Top Layer w10: U5.OUT2@7535.43,7301.69 7535.43,7263.19 7566.93,7231.69 U5.OUT2@7566.93,7301.69 ; 7598.43,7231.69 U5.OUT2@7598.43,7301.69 ; 7629.92,7231.69 U5.OUT2@7629.92,7301.69 ; 7661.42,7231.69 U5.OUT2@7661.42,7301.69 ; 7692.91,7231.69 U5.OUT2@7692.91,7301.69
  Top Layer w40: 7566.93,7231.69 7598.43,7231.69 7629.92,7231.69 7661.42,7231.69 7692.91,7231.69 7827.01,7231.69 8147.01,6911.69 8367.01,6911.69 9096.77,6181.93 9096.77,5940.67
13V6_TX2_EN: U5.IN2 U9.28 | length 806.5
  Top Layer w6: U9.28@7555.28,7105.04 7610.35,7105.04 v2(7647.01,7141.69) ; v2@7598.43,7613.11 U5.IN2@7598.43,7675.71
  Bottom Layer w6: v2(7597.01,7611.69) 7677.01,7611.69 7767.01,7521.69 7767.01,7261.69 v2(7647.01,7141.69)
A0: U101.79 U102.25 U103.5 | length 3676.9
  Top Layer w5.91: v1(3393.78,2949.92) 3474.49,3030.63 v1(3592.6,3030.62) ; U103.5@3570.94,2786.54 3570.94,2737.32 3578.82,2729.45 v1(3578.82,2705.83) ; v1(3671.34,2951.89) U102.25@3745.16,2951.89 ; U101.79@5154.61,2932.2 v1(5216.61,2932.2)
  Bottom Layer w5.91: v1@3395.75,2951.89 v1(3393.78,2949.92) ; v1(3578.82,2705.83) 3578.82,2595.59 3547.8,2564.57 3410.74,2564.57 3393.78,2581.53 3393.78,2874.84 3403.62,2884.68 3403.62,2900.99 3393.78,2910.83 v1(3393.78,2949.92) ; v1(3592.6,3030.62) v1(3671.34,2951.89) ; v1(5216.61,2932.2) 5198.9,2914.49 4133.94,2914.49 4017.8,3030.63 4017.8,3205.83 3836.69,3386.93 3643.78,3386.93 3393.78,3136.93 v1(3393.78,2949.92)
A1: U101.83 U102.24 U103.4 | length 3939.8
  Top Layer w5.91: U102.24@2987.28,2951.89 3070.94,2951.89 3120.16,2951.89 3159.53,2991.26 v1(3159.53,3070) ; v1(3602.44,2725.51) U103.4@3602.44,2786.54 ; U101.83@5154.61,3010.95 v1(5226.46,3010.95)
  Bottom Layer w5.91: v1(3602.44,2725.51) 3602.44,2587.72 3563.07,2548.35 3405.59,2548.35 3381.97,2571.97 3381.97,2781.61 3159.53,3004.06 v1(3159.53,3070) 3159.53,3119.21 3169.37,3129.06 3369.2,3129.06 3638.89,3398.74 3841.58,3398.74 4029.61,3210.72 4029.61,3035.93 4139.24,2926.3 5141.81,2926.3 v1(5226.46,3010.95)
A2: U101.97 U102.23 U103.3 | length 4154.6
  Top Layer w5.91: U102.23@2987.28,2971.57 3120.16,2971.57 3139.84,2991.26 v1(3139.84,3050.32) ; v1(3633.94,2705.83) U103.3@3633.94,2786.54 ; U101.97@5154.61,3286.54 v1(5226.46,3286.54)
  Bottom Layer w5.91: v1(3633.94,2705.83) 3633.94,2587.72 3578.82,2532.6 3397.72,2532.6 3370.16,2560.16 3370.16,2776.69 3147.72,2999.13 3147.72,3042.44 v1(3139.84,3050.32) 3139.84,3138.9 3149.68,3148.74 3372.18,3148.74 3634,3410.55 3846.48,3410.55 4041.42,3215.61 4041.42,3040.82 4144.13,2938.11 4964.24,2938.11 5226.46,3200.33 v1(5226.46,3286.54)
A3: U101.103 U102.22 U103.2 | length 4293.5
  Top Layer w5.91: U102.22@2987.28,2991.26 3070.94,2991.26 3110.31,2991.25 3120.16,3001.1 v1(3120.16,3030.63) ; v1(3665.43,2725.51) U103.2@3665.43,2786.54 ; U101.103@5154.61,3404.65 v1(5216.61,3404.65)
  Bottom Layer w5.91: v1(3665.43,2725.51) 3665.43,2587.72 3594.57,2516.85 3389.84,2516.85 3358.35,2548.35 3358.35,2771.77 3120.16,3009.96 v1(3120.16,3030.63) 3120.16,3158.58 3130,3168.43 3375.17,3168.43 3629.1,3422.36 3851.37,3422.36 4053.23,3220.5 4053.23,3045.71 4149.02,2949.92 4959.35,2949.92 5196.93,3187.5 5196.93,3384.96 v1(5216.61,3404.65)
A4: U101.107 U102.21 U103.1 | length 4569.9
  Top Layer w5.91: U102.21@2987.28,3010.95 3090.63,3010.95 3100.47,3020.79 v1(3100.47,3050.32) ; v1(3696.93,2705.83) U103.1@3696.93,2786.54 ; U101.107@5049.29,3490.28 v1(5049.29,3552.28)
  Bottom Layer w5.91: v1(3696.93,2705.83) 3696.93,2587.72 3610.31,2501.1 3381.97,2501.1 3346.54,2536.54 3346.54,2765.87 3100.47,3011.93 v1(3100.47,3050.32) 3100.47,3168.43 3120.16,3188.11 3376.06,3188.11 3622.13,3434.17 3856.26,3434.17 4065.04,3225.4 4065.04,3050.61 4153.91,2961.73 4954.45,2961.73 5185.12,3192.4 5185.12,3455.83 5108.35,3532.6 5068.98,3532.6 v1(5049.29,3552.28)
A5: U101.113 U102.20 U103.44 | length 4555.6
  Top Layer w5.91: U102.20@2987.28,3030.63 v1@3070.94,3030.63 ; U103.44@3696.93,2349.53 v1(3696.93,2398.74) ; v1(4911.5,3571.97) 4931.18,3552.28 4931.18,3542.44 U101.113@4931.18,3490.28
  Bottom Layer w5.91: v1(3696.93,2398.74) 3610.31,2485.35 3374.09,2485.35 3334.72,2524.72 3334.72,2760.95 3080.79,3014.88 v1(3080.79,3030.63) 3080.79,3178.27 3110.31,3207.8 3379.04,3207.8 3617.23,3445.98 3861.15,3445.98 4076.85,3230.29 4076.85,3055.5 4158.8,2973.54 4949.56,2973.54 5173.31,3197.29 5173.31,3450.93 5103.45,3520.79 4962.68,3520.79 v1(4911.5,3571.97)
A6: U101.121 U102.19 U103.43 | length 4621
  Top Layer w5.91: U102.19@2987.28,3050.32 v1(3061.1,3050.32) ; U103.43@3665.43,2349.53 v1(3665.43,2398.74) ; U101.121@4773.7,3490.28 v1(4773.7,3542.44)
  Bottom Layer w5.91: v1@3665.43,2396.77 3592.6,2469.61 3366.22,2469.61 3322.91,2512.91 3322.91,2755.03 3061.1,3016.84 v1(3061.1,3050.32) 3061.1,3188.11 3100.47,3227.48 3382.03,3227.48 3612.34,3457.8 3866.05,3457.8 4088.66,3235.18 4088.66,3060.39 4163.7,2985.35 4944.67,2985.35 5161.5,3202.18 5161.5,3446.04 5098.56,3508.98 4807.17,3508.98 v1(4773.7,3542.44)
A7: U101.127 U102.18 U103.42 | length 4705.2
  Top Layer w5.91: U102.18@2987.28,3070 v1(3041.42,3070) ; U103.42@3633.94,2349.53 v1(3633.94,2398.74) ; U101.127@4655.59,3490.28 v1(4655.59,3542.44)
  Bottom Layer w5.91: v1(3633.94,2398.74) 3578.82,2453.86 3358.35,2453.86 3311.1,2501.1 3311.1,2750.14 3041.42,3019.82 v1(3041.42,3070) 3041.42,3197.95 3090.63,3247.17 3385.01,3247.17 3607.45,3469.61 3870.94,3469.61 4100.47,3240.07 4100.47,3065.28 4168.59,2997.17 4939.78,2997.17 5149.69,3207.07 5149.69,3441.15 5093.67,3497.17 4700.87,3497.17 v1(4655.59,3542.44)
A8: U101.131 U102.8 U103.27 | length 4593.7
  Top Layer w5.91: U102.8@2987.28,3266.85 v1(3041.42,3266.85) ; U103.27@3161.5,2349.53 v1(3161.5,2430.24) ; U101.131@4576.85,3490.28 v1(4576.85,3552.28)
  Bottom Layer w5.91: v1(3161.5,2430.24) 3275.67,2544.41 3275.67,2768.87 3021.73,3022.8 3021.73,3247.17 v1(3041.42,3266.85) 3208.74,3266.85 3387.99,3266.85 3602.56,3481.42 3875.83,3481.42 4112.28,3244.96 4112.28,3070.17 4173.48,3008.98 4934.89,3008.98 5137.87,3211.97 5137.87,3434.17 5086.69,3485.35 4643.78,3485.35 v1(4576.85,3552.28)
A9: U101.135 U102.7 U103.26 | length 4708.8
  Top Layer w5.91: U102.7@2987.28,3286.54 v1(3070.94,3286.54) ; U103.26@3130,2349.53 v1(3130,2430.24) ; U101.135@4498.11,3490.28 v1(4498.11,3552.28)
  Bottom Layer w5.91: v1(3130,2430.24) 3263.86,2564.09 3263.86,2763.97 3009.92,3017.91 3009.92,3274.72 3021.73,3286.54 v1(3070.94,3286.54) 3208.74,3286.54 3390.97,3286.54 3597.67,3493.23 3880.72,3493.23 4124.09,3249.86 4124.09,3075.07 4178.37,3020.79 4929.99,3020.79 5126.06,3216.86 5126.06,3429.28 5081.8,3473.54 4576.85,3473.54 v1(4498.11,3552.28)
A10: U101.145 U102.6 U103.25 | length 4879.5
  Top Layer w5.91: U102.6@2987.28,3306.22 v1(3041.42,3306.22) ; U103.25@3098.5,2349.53 v1(3098.5,2430.24) ; U101.145@4301.26,3490.28 4301.26,3542.44 v1(4320.94,3562.13)
  Bottom Layer w5.91: v1(3098.5,2430.24) 3252.05,2583.78 3252.05,2759.08 2998.11,3013.02 2998.11,3292.44 3011.89,3306.22 v1(3041.42,3306.22) 3208.74,3306.22 3393.95,3306.22 3592.77,3505.04 3885.61,3505.04 4135.91,3254.75 4135.91,3079.96 4183.27,3032.6 4925.1,3032.6 5114.25,3221.75 5114.25,3424.39 5076.91,3461.73 4421.34,3461.73 v1(4320.94,3562.13)
A11: U101.149 U102.5 U103.24 | length 4972.4
  Top Layer w5.91: U102.5@2987.28,3325.91 v1(3070.94,3325.91) ; U103.24@3067.01,2349.53 v1(3067.01,2430.24) ; U101.149@4222.52,3490.28 v1@4222.52,3542.44
  Bottom Layer w5.91: v1(3067.01,2430.24) 3240.24,2603.46 3240.24,2754.19 2984.33,3010.1 2984.33,3298.35 3011.89,3325.91 v1(3070.94,3325.91) 3396.94,3325.91 3587.88,3516.85 3890.51,3516.85 4147.72,3259.64 4147.72,3084.85 4188.16,3044.41 4920.21,3044.41 5102.44,3226.64 5102.44,3419.5 5072.02,3449.92 4324.88,3449.92 v1(4222.52,3552.28)
A12: U101.155 U102.4 U103.23 | length 5066
  Top Layer w5.91: U102.4@2987.28,3345.59 v1(3041.42,3345.59) ; U103.23@3035.51,2349.53 v1(3035.51,2430.24) ; U101.155@4104.41,3490.28 v1(4104.41,3552.28)
  Bottom Layer w5.91: v1(3035.51,2430.24) 3228.43,2623.15 3228.43,2749.3 2972.52,3005.2 2972.52,3306.22 3011.89,3345.59 v1(3041.42,3345.59) 3399.92,3345.59 3582.99,3528.66 3895.4,3528.66 4159.53,3264.53 4159.53,3089.74 4193.05,3056.22 4915.32,3056.22 5090.63,3231.53 5090.63,3414.6 5074.94,3430.29 4226.4,3430.29 v1(4104.41,3552.28)
A13: U101.159 U102.3 U103.22 | length 4946.2
  Top Layer w5.91: U102.3@2987.28,3365.28 v1(3070.94,3365.28) ; v1(3035.51,2721.58) U103.22@3035.51,2786.54 ; U101.159@4018.78,3384.96 4019.76,3383.98 4192.01,3383.98 v1(4192.99,3384.96)
  Bottom Layer w5.91: v1(3035.51,2721.58) 3114.25,2642.83 3185.12,2642.83 3216.61,2674.33 3216.61,2744.41 2960.71,3000.31 2960.71,3314.09 3011.89,3365.28 v1(3070.94,3365.28) 3208.74,3365.28 3402.9,3365.28 3578.1,3540.47 3900.29,3540.47 4171.34,3269.43 4171.34,3094.64 4197.94,3068.03 4910.42,3068.03 5078.82,3236.43 5078.82,3404.65 5068.98,3414.49 4222.52,3414.49 v1(4192.99,3384.96)
A14: U101.173 U102.2 U103.21 | length 2834.9
  Top Layer w5.91: U102.2@2987.28,3384.96 v1(3041.42,3384.96) ; v1(3067.01,2721.57) U103.21@3067.01,2786.54 ; U101.173@4018.78,3109.37 v1(4202.83,3109.37)
  Bottom Layer w5.91: v1(3067.01,2721.57) 3122.13,2666.46 3185.12,2666.46 3204.8,2686.14 3204.8,2739.51 2944.96,2999.36 2944.96,3318.03 3011.89,3384.96 v1(3041.42,3384.96) 3405.88,3384.96 3573.2,3552.28 3905.18,3552.28 4183.15,3274.32 4183.15,3129.06 v1(4202.83,3109.37)
A15: U101.101 U102.1 U103.20 | length 3803
  Top Layer w5.91: U102.1@2987.28,3404.65 v1(3070.94,3404.65) ; v1(3098.5,2721.57) U103.20@3098.5,2786.54 ; v1(5049.29,3365.28) U101.101@5154.61,3365.28
  Bottom Layer w5.91: v1(3098.5,2721.57) 3137.87,2682.2 3177.24,2682.2 3192.99,2697.95 3192.99,2734.62 2933.15,2994.46 2933.15,3325.91 3011.89,3404.65 v1(3070.94,3404.65) 3208.74,3404.65 3408.86,3404.65 3568.31,3564.09 3910.08,3564.09 4194.96,3279.21 4194.96,3168.54 4283.66,3079.84 4905.53,3079.84 5067.01,3241.32 5067.01,3347.56 v1(5049.29,3365.28)
A16: U101.104 U102.48 U103.19 | length 4406.2
  Top Layer w5.91: v1(3041.42,3424.33) 3543.39,3424.33 3563.07,3404.65 U102.48@3745.16,3404.65 ; v1(3130,2721.58) U103.19@3130,2786.54 ; v1(5049.29,3394.8) 5078.82,3424.33 U101.104@5154.61,3424.33
  Bottom Layer w5.91: v1(3130,2721.58) 3153.62,2697.95 3169.37,2697.95 3181.18,2709.76 3181.18,2729.73 2921.34,2989.57 2921.34,3341.65 3004.02,3424.33 v1(3041.42,3424.33) 3411.85,3424.33 3563.42,3575.91 3914.97,3575.91 4206.77,3284.1 4206.77,3173.43 4288.55,3091.65 4900.64,3091.65 5029.61,3220.62 5029.61,3375.12 v1(5049.29,3394.8)
A17: U101.105 U102.17 U103.18 | length 3792.6
  Top Layer w5.91: v1(2893.78,3089.69) U102.17@2987.28,3089.69 ; v1(3161.5,2721.57) U103.18@3161.5,2786.54 ; v1(5009.92,3394.8) 5049.29,3434.17 5068.98,3434.17 5088.66,3453.86 U101.105@5088.66,3490.28 v1(5088.66,3552.28)
  Bottom Layer w5.91: v1(3161.5,2721.57) 2893.78,2989.29 v1(2893.78,3089.69) 2893.78,3093.62 2909.53,3109.37 2909.53,3346.55 3019.79,3456.81 3427.62,3456.81 3558.53,3587.72 3919.86,3587.72 4218.58,3288.99 4218.58,3178.33 4293.44,3103.46 4895.75,3103.46 5009.92,3217.64 v1(5009.92,3394.8)
A18: U101.111 U102.16 | length 3113.1
  Top Layer w5.91: v1(2884.92,3121.18) 2896.73,3109.37 U102.16@2987.28,3109.37 ; v1(4970.55,3394.8) U101.111@4970.55,3490.28
  Bottom Layer w5.91: v1@2884.92,3120.2 2897.72,3132.99 2897.72,3351.44 3014.9,3468.62 3422.73,3468.62 3553.64,3599.53 3924.75,3599.53 4230.39,3293.89 4230.39,3183.22 4298.34,3115.28 4890.86,3115.28 4970.55,3194.97 v1(4970.55,3394.8)
A19: U101.109 U102.9 | length 2935.8
  Top Layer w5.91: v1(2933.15,3424.33) 2933.15,3257.01 2942.99,3247.17 U102.9@2987.28,3247.17 ; v1(4931.18,3316.06) 4990.24,3375.12 4990.24,3414.49 5009.92,3434.17 U101.109@5009.92,3490.28
  Bottom Layer w5.91: v1(2933.15,3424.33) 2989.25,3480.43 3417.84,3480.43 3548.74,3611.34 3929.64,3611.34 4242.2,3298.78 4242.2,3188.11 4303.23,3127.09 4885.96,3127.09 4931.18,3172.3 v1(4931.18,3316.06)
ADDRESS0: U201.11 U203.3 | length 465.4
  Top Layer w5.91: U203.3@3200.87,3691.06 3267.91,3691.06 3322.8,3745.94 3322.8,3895.94 3370.75,3943.9 U201.11@3370.75,4046.77
ADDRESS1: U201.10 U203.4 | length 422.3
  Top Layer w5.91: U203.4@3200.87,3716.65 3273.5,3716.65 3307.8,3750.94 3307.8,3905.94 3320.75,3918.9 U201.10@3320.75,4046.77
ADDRESS2: U201.9 U203.5 | length 394.6
  Top Layer w5.91: U203.5@3200.87,3742.24 3274.09,3742.24 3292.8,3760.95 3292.8,3894.57 3270.75,3916.61 U201.9@3270.75,4046.77
ADDRESS3: U201.8 U203.6 U203.10 | length 602.9
  Top Layer w5.91: U203.10@2980.39,3793.43 3129.02,3793.43 3154.61,3767.83 U203.6@3200.87,3767.83 3264.69,3767.83 3277.8,3780.94 3277.8,3885.94 3220.75,3942.99 U201.8@3220.75,4046.77
ADDRESS4: U201.7 U203.11 | length 467.4
  Top Layer w5.91: U203.11@2980.39,3767.83 2943.98,3767.83 2937.09,3774.72 2937.09,3860.24 2967.8,3890.94 3057.24,3890.94 3170.75,4004.45 U201.7@3170.75,4046.77
ADDRESS5: U201.6 U203.12 | length 488.8
  Top Layer w5.91: U203.12@2980.39,3742.24 2937.09,3742.24 2924.29,3755.04 2924.29,3867.44 2962.8,3905.94 3055.54,3905.94 3120.75,3971.15 U201.6@3120.75,4046.77
ADDRESS6: U201.5 U203.13 | length 503.5
  Top Layer w5.91: U203.13@2980.39,3716.65 2937.09,3716.65 2912.48,3741.26 2912.48,3872.33 2957.9,3917.76 3050.59,3917.76 3070.75,3937.91 U201.5@3070.75,4046.77
ADDRESS7: U201.4 U203.14 | length 544.7
  Top Layer w5.91: U201.4@2977.05,4140.47 2898.7,4062.13 2898.7,3723.25 2930.89,3691.06 U203.14@2980.39,3691.06
AFSK1_RX: R211.A.2 U232.12 | length 442.4
  Top Layer w5.91: R211.A.2@4899.69,4398.74 4980.39,4398.74 5000.08,4379.06 5000.08,4182.2 5026.65,4155.63 U232.12@5126.06,4155.63
AFSK1_TX: U211.A.7 U233.14 | length 584.8
  Top Layer w5.91: v1(4647.32,4479.06) 4672.32,4504.06 U211.A.7@4726.46,4504.06 ; v1(5057.17,4439.09) U233.14@5126.06,4439.09
  Bottom Layer w5.91: v1(4647.32,4479.06) 5017.2,4479.06 v1(5057.17,4439.09)
AFSK2_RX: R211.B.2 U232.13 | length 439.5
  Top Layer w5.91: R211.B.2@4899.69,3886.93 4980.39,3886.93 5000.08,3906.61 5000.08,4098.54 5031.57,4130.04 U232.13@5126.06,4130.04
AFSK2_TX: U211.B.7 U233.15 | length 886.3
  Top Layer w5.91: v1(4647.32,3967.24) 4672.32,3992.24 U211.B.7@4726.46,3992.24 ; 5082.76,4413.5 U233.15@5126.06,4413.5
  Bottom Layer w5.91: v1(4647.32,3967.24) 4847.32,3967.24 4897.32,4017.24 4897.32,4266.46 5044.37,4413.5 v1(5069.96,4413.5)
BCN: R201.1 U202.5 U233.13 | length 2620.1
  Top Layer w5.91: U202.5@3472.52,3884.96 3501.06,3884.96 ; R201.1@3580.79,3847.56 3608.35,3847.56 3616.22,3855.43 3616.22,3875.12 3606.38,3884.96 3501.06,3884.96 ; U233.13@5126.06,4464.69 5044.37,4464.69 5019.76,4489.29 5019.76,4605.43 4980.39,4644.8 3694.96,4644.8 3502.05,4451.89 3502.05,3885.94 3501.06,3884.96